# Altium PCB Template_F411.PcbDoc
Units mil, origin at the board's own origin, x right, y up, seen from the top; angles counter-clockwise.
Board outline 6000 x 4000 mil, 2 copper layers (Top Layer, Bottom Layer), stack 61.2 mil thick; 5 components, 0 nets, 0 pads, 4 vias.
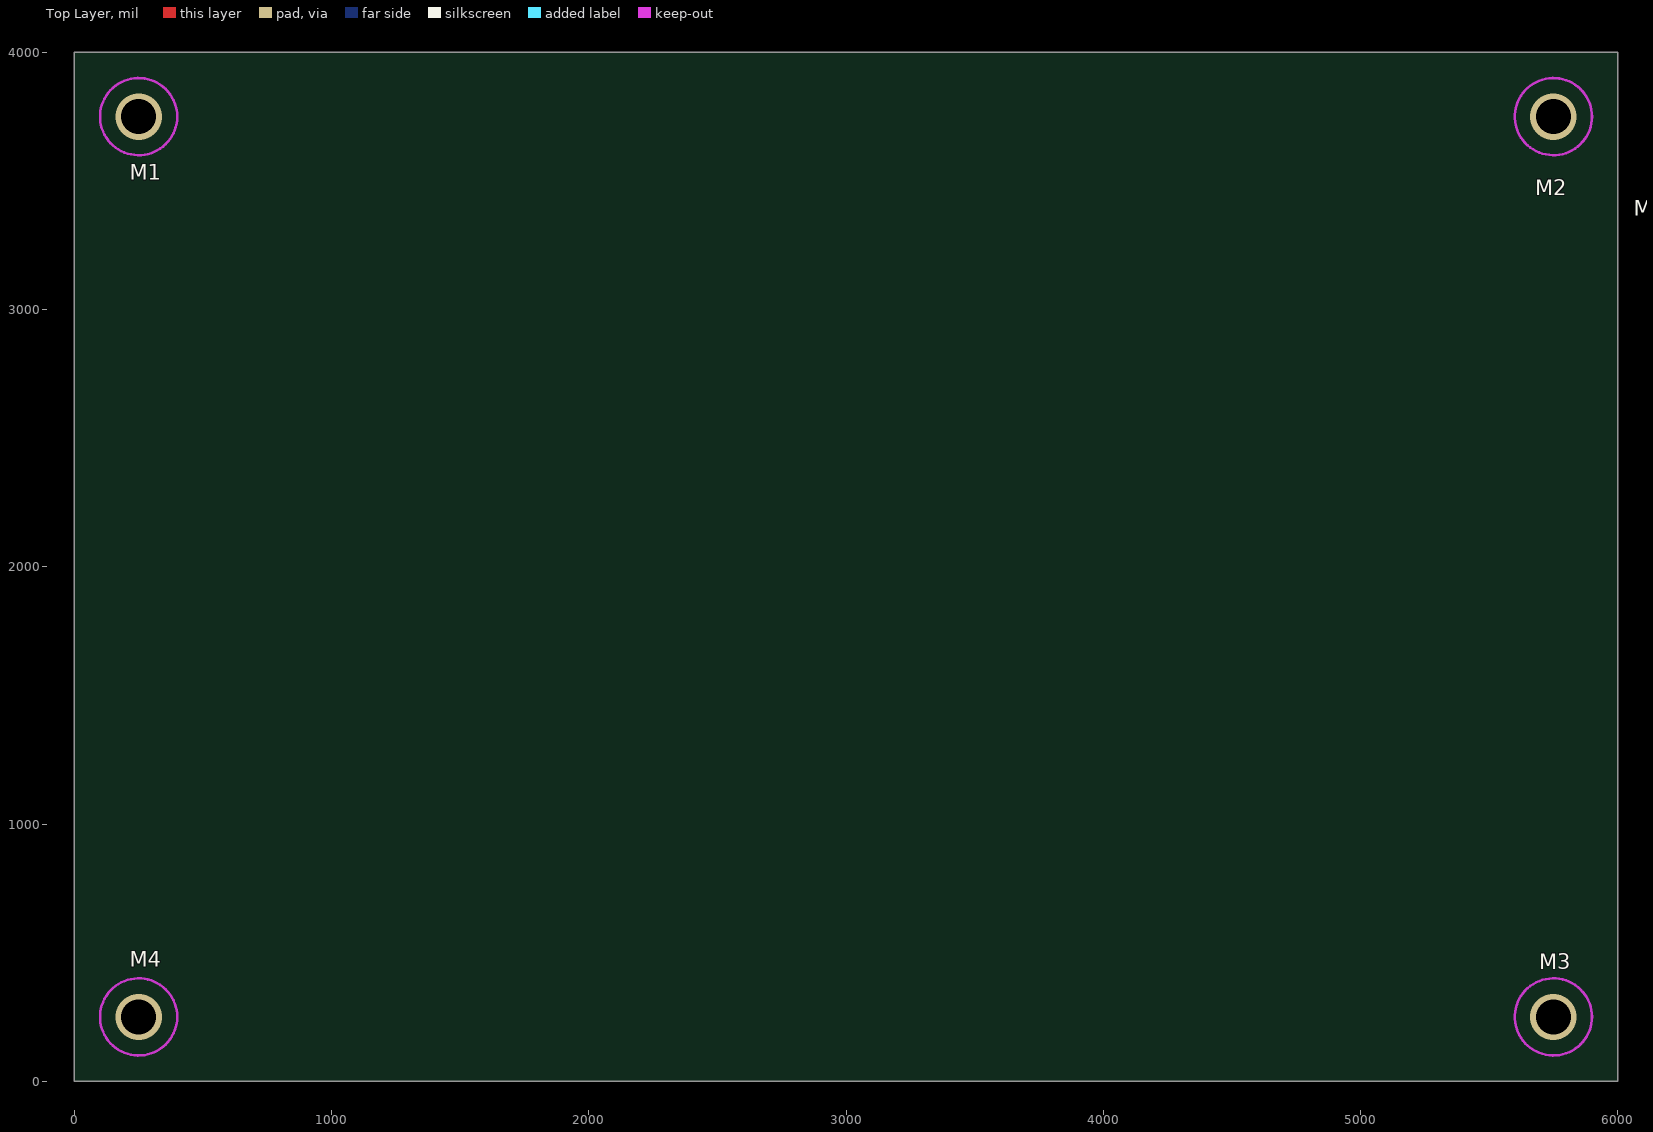
[diagram p0: Top Layer view]
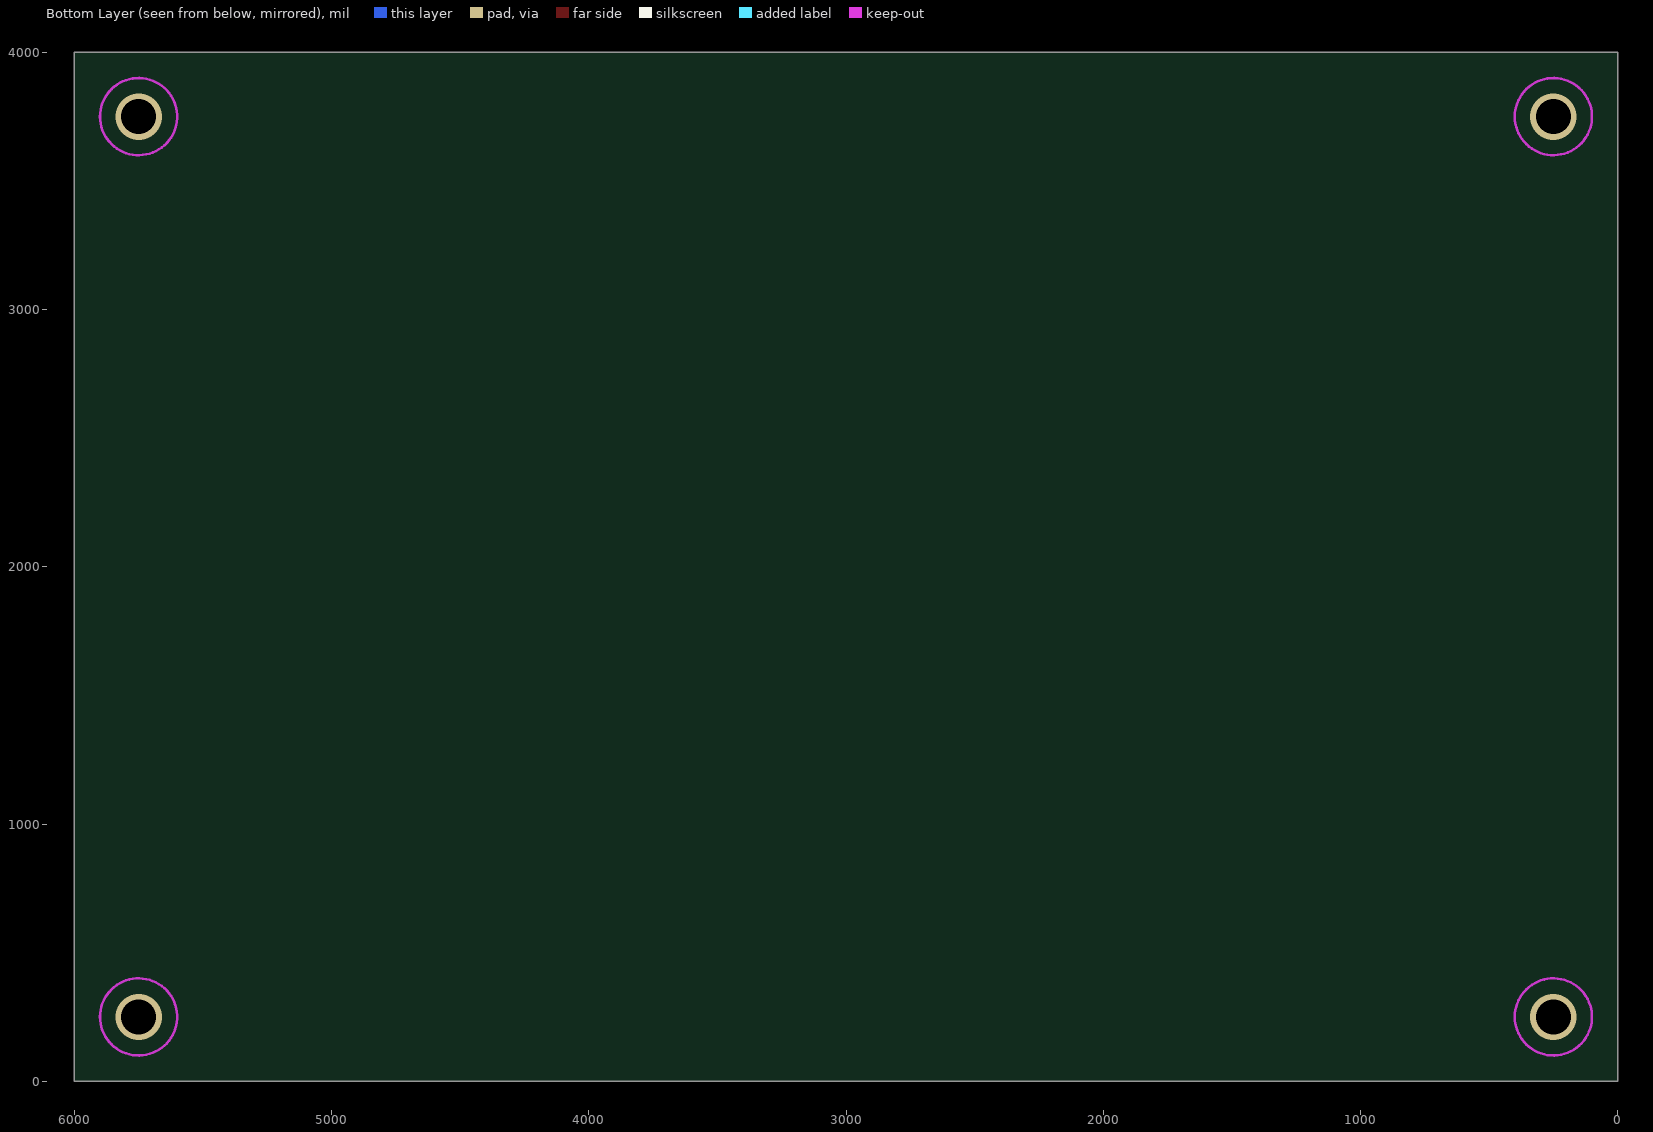
[diagram p1: Bottom Layer view, seen from below]

## Layer stack, top to bottom
Top Solder: solder mask 0.4, Solder Resist, Dk 3.5
Top Layer: signal copper 1.4
Dielectric 1: dielectric 58.4, FR-4, Dk 4.8
Bottom Layer: signal copper 1.4
Bottom Solder: solder mask 0.4, Solder Resist, Dk 3.5

## Board outline
0,0 6000,0 6000,4000 0,4000

## Design rules (kind name [scope] priority, off if disabled: settings)
Clearance [All] p1: gap=6 ignorepadtopadclearanceinfootprint=TRUE
HoleSize [All] p1: absolutevalues=TRUE maxlimit=150 minlimit=20 maxpercent=80.000 minpercent=20.000
MinimumAnnularRing [All] p1: minimumring=10
MinimumSolderMaskSliver [All] p1: minsoldermaskwidth=3
PolygonConnect [All] p1: connectstyle=Relief reliefconductorwidth=10 reliefentries=4 polygonreliefangle="90 Angle" airgapwidth=10
RoutingVias [All] p1: holewidth=20 width=30 viastyle="Through Hole" minholewidth=20 minwidth=30 maxholewidth=40 maxwidth=50
SolderMaskExpansion [All] p1: expansion=5 istentingtop=FALSE
Width Power [InNetClass('POWER')] p1: maxlimit=100 minlimit=20 preferedwidth=30
Width [All] p2: maxlimit=10 minlimit=10 preferedwidth=10
28 further rules are at their usual default settings.

## Components (designator, comment, footprint, x,y, rotation, side; value= is the part's Value field where it differs from the comment)
M1 "MOUNTING_HOLE" MOUNTING_HOLE 250,3750 r0 top locked
M2 "MOUNTING_HOLE" MOUNTING_HOLE 5750,3750 r0 top locked
M3 "MOUNTING_HOLE" MOUNTING_HOLE 5750,250 r0 top locked
M4 "MOUNTING_HOLE" MOUNTING_HOLE 250,250 r0 top locked
M5 "Nucleo-64" NUCLEO_64 6180,2065 r0 top

## Footprints (in the part's own frame and the unit in brackets; to place one, negate y for a bottom-side part, rotate by r counter-clockwise, add the part's x,y. Pads: shape width x height; smd on the part's side, far side on the other; paste and mask are expansions set on the pad)
MOUNTING_HOLE [mil]
  Keep-Out Layer circle w10: c0,0 r150
NUCLEO_64 [mil] "Nucleo 64 Placeholder"
  body extent -128,-1998 2628,1269, height 394

## Part data
M1 M2 M3 M4: "Mounting Hole"
M5: "Nucleo-64 Board Model"

## Via types
v1: diameter 180, hole 136, Top Layer to Bottom Layer, 4 vias

## Nets (pads, with @x,y where several pads share a name; then routed paths per layer and width w, separated by ;. In a path a pad name is that pad's centre, name@x,y a point inside that pad or via, vN(x,y) a via of type N, cw(c..) or ccw(c..) an arc to the next point about the centre after c; other vN are vias at no path point)
copper on no net:
  other v1: 250,250 5750,250 250,3750 5750,3750